# EAGLE board challenge 06 (EAGLE 9.7.0)

Size 159.26 x 89.37 mm. Coordinates in mm from the lower left corner, seen from the top.
Outline: 0,0 159.26,0 159.26,89.37 0,89.37 0,0
Copper layers (1*16): Top 0.035mm / dielectric 1.5mm / Bottom 0.035mm
Design rules "default": minimum track width 6mil, minimum drill 0.35mm, track to track 6mil, track to pad 6mil, pad to pad 6mil, via to via 6mil, smd to smd 6mil, copper to edge 40mil, drill to drill 6mil, minimum pad ring 10mil, minimum via ring 8mil, stop-mask expansion 4mil, vias tented up to drill 0mil, thermal gap 10mil

## Footprints (pad centres in the part's own frame; a part is rotated, then mirrored left to right if it is on the bottom)
CAP-THRU-2.54MM = drill 1.016 pad 1.88: 1 -1.27,0; 2 1.27,0
BATTERY-GENERIC = drill 1.118 pad 3.15 octagon: + 2.54,0; - -2.54,0
RESAD1016W63L850D250B = drill 0.83 pad 1.43: 1 -5.08,0; 2 5.08,0
SWITCH-SPDT-PTH-8.5X3.7MM = drill 1.016 pad 1.88: 1 -2.54,0; 2 0,0; 3 2.54,0
SWITCH-MOMENTARY-PTH-6.5MM = drill 1.016 pad 1.88: 1 -3.251,2.261; 2 3.251,2.261; 3 -3.251,-2.261; 4 3.251,-2.261
JHD-162A = drill 1.016 long: 1 -19.05,0; 2 -16.51,0; 3 -13.97,0; 4 -11.43,0; 5 -8.89,0; 6 -6.35,0; 7 -3.81,0; 8 -1.27,0; 9 1.27,0; 10 3.81,0; 11 6.35,0; 12 8.89,0; 13 11.43,0; 14 13.97,0; 15 16.51,0; 16 19.05,0

## Placement (x,y rotation side)
C1  0.1u  [CAP-THRU-2.54MM]  26.11,41.58 180 top
P1  BATTERYGENERIC  [BATTERY-GENERIC]  8.26,81.11 180 top
R1  220  [RESAD1016W63L850D250B]  95.96,41.58 0 top
R2  220  [RESAD1016W63L850D250B]  101.04,69.52 90 top
R3  220  [RESAD1016W63L850D250B]  111.2,69.52 90 top
R4  220  [RESAD1016W63L850D250B]  123.9,69.52 90 top
R5  220  [RESAD1016W63L850D250B]  136.6,69.52 90 top
R6  220  [RESAD1016W63L850D250B]  149.3,69.52 90 top
R7  220  [RESAD1016W63L850D250B]  42.62,33.96 90 top
S1  TOGGLE  [SWITCH-SPDT-PTH-8.5X3.7MM]  90.88,59.36 0 top
S2  SWITCH_MOMENTARY  [SWITCH-MOMENTARY-PTH-6.5MM]  103.58,60.63 270 top
S7  TOGGLE  [SWITCH-SPDT-PTH-8.5X3.7MM]  113.74,59.36 0 top
S8  TOGGLE  [SWITCH-SPDT-PTH-8.5X3.7MM]  126.44,59.36 0 top
S9  TOGGLE  [SWITCH-SPDT-PTH-8.5X3.7MM]  139.14,59.36 0 top
S10  TOGGLE  [SWITCH-SPDT-PTH-8.5X3.7MM]  151.84,59.36 0 top
U1  LCD-16X2JHD-162A  [JHD-162A]  74.37,36.63 0 top

## Library data of the parts
C1 P1 R1-R7 S1 S2 S7-S10 U1 = Tinkercad

## Nets
P1+: P1.+ R1.2 S1.3 S2.1 S2.2 S7.3 S8.3 S9.3 S10.3 U1.2
P1-: P1.- R2.2 R3.2 R4.2 R5.2 R6.2 R7.1 S1.1 U1.1 U1.5 U1.7 U1.8 U1.9 U1.10 U1.16
S7_O: R3.1 S7.1
S8_O: R4.1 S8.1
S9_O: R5.1 S9.1
S10_O: R6.1 S10.1
U1_DB4: S7.2 U1.11
U1_DB5: S8.2 U1.12
U1_DB6: S9.2 U1.13
U1_DB7: S10.2 U1.14
U1_ENA: R2.1 S2.3 S2.4 U1.6
U1_LED+: R1.1 U1.15
U1_RS: S1.2 U1.4
U1_VO: R7.2 U1.3

## Tracks (layer width: path | path; a pad name or v marks a point on that pad's centre or on a via)
P1+  (9 unrouted)
P1-  (14 unrouted)
S7_O  (1 unrouted)
S8_O  (1 unrouted)
S9_O  (1 unrouted)
S10_O  (1 unrouted)
U1_DB4  (1 unrouted)
U1_DB5  (1 unrouted)
U1_DB6  (1 unrouted)
U1_DB7  (1 unrouted)
U1_ENA  (3 unrouted)
U1_LED+  (1 unrouted)
U1_RS  (1 unrouted)
U1_VO  (1 unrouted)